# Altium PCB LAF_PD.PcbDoc
Units mm, origin at the board's own origin, x right, y up, seen from the top; angles counter-clockwise.
Board outline 30 x 30 mm, 2 copper layers (Top Layer, Bottom Layer); 5 components, 0 nets, 25 pads, 0 vias.
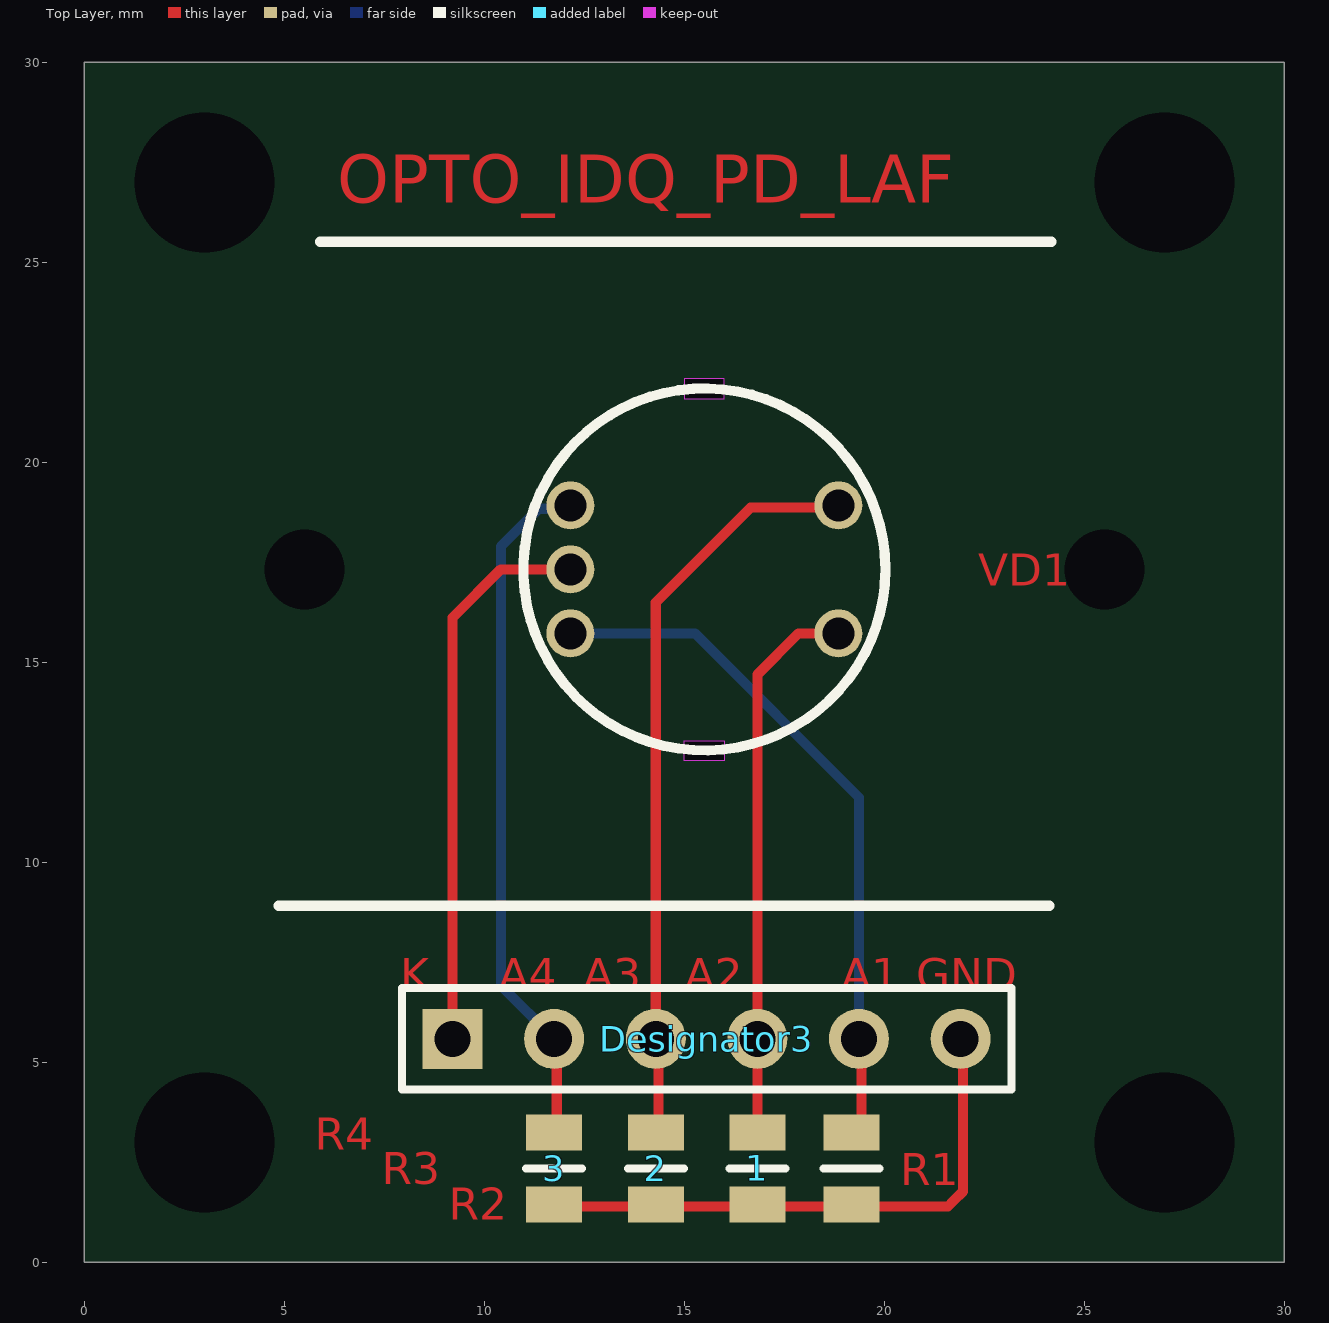
[diagram p0: Top Layer view]
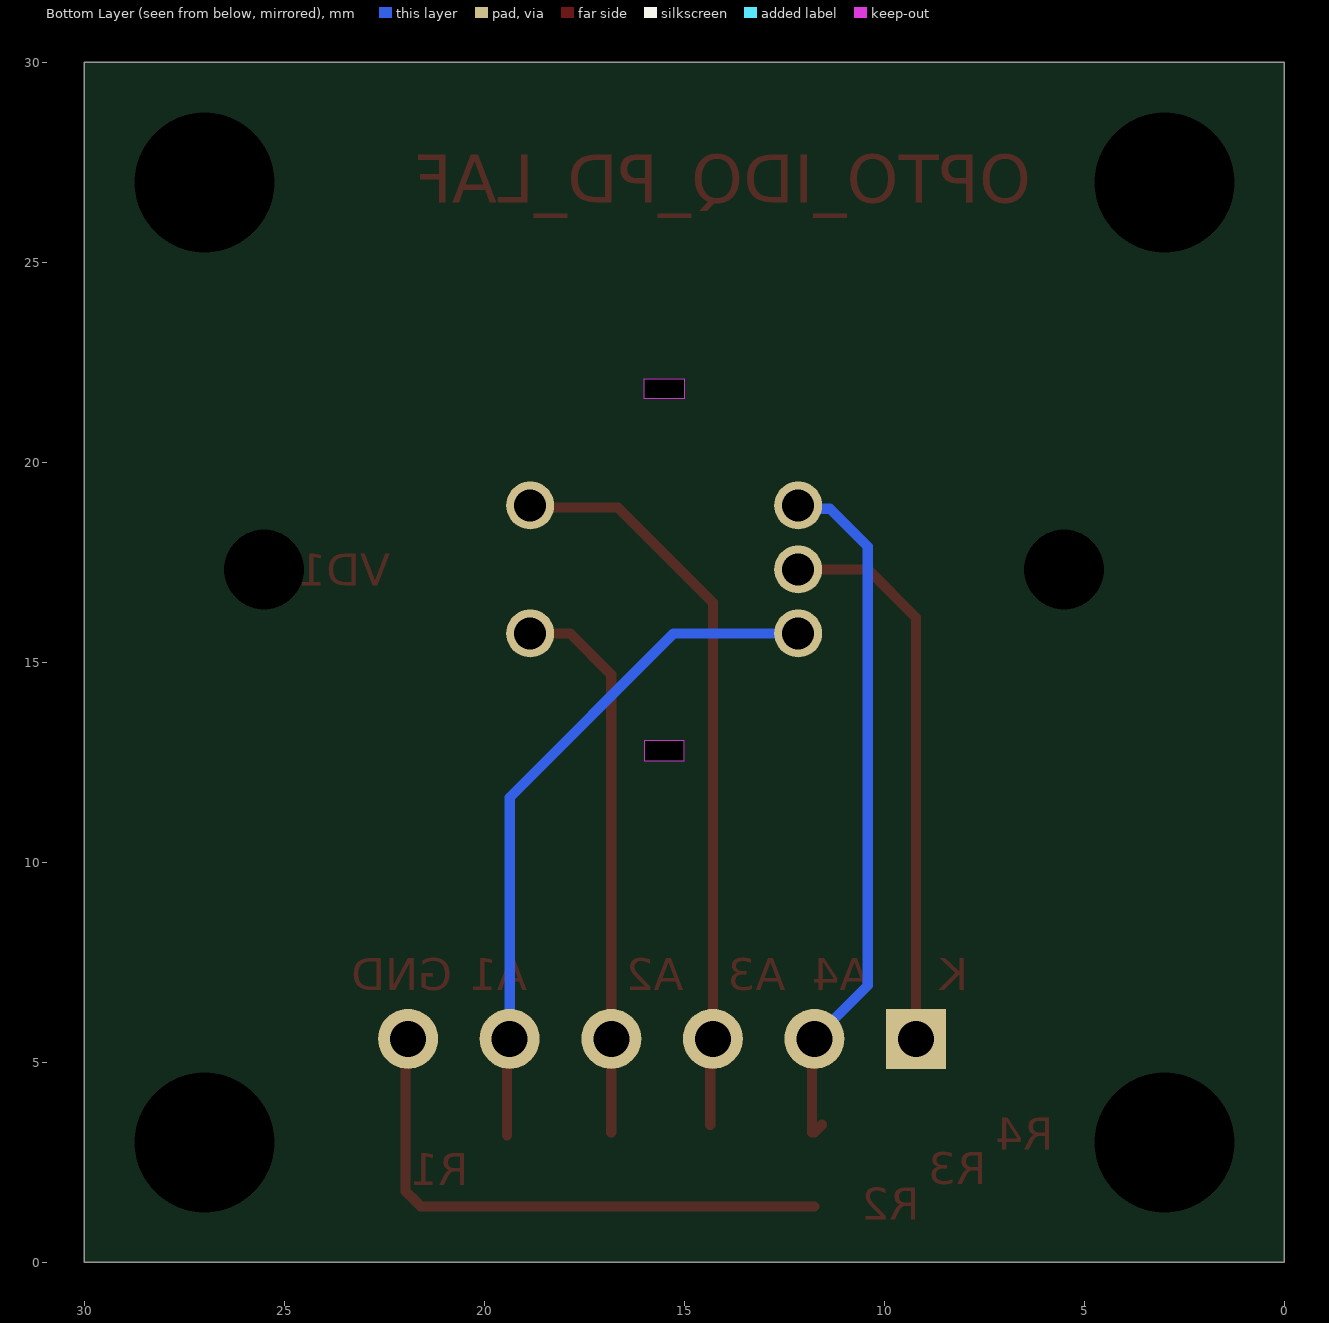
[diagram p1: Bottom Layer view, seen from below]

## Layer stack, top to bottom
Top Solder: solder mask 0.0102, Solder Resist, Dk 3.5
Top Layer: signal copper 0.0356
Dielectric 1: dielectric 0.32, FR-4, Dk 4.8
Bottom Layer: signal copper 0.0356
Bottom Solder: solder mask 0.0102, Solder Resist, Dk 3.5

## Board outline
0,0 0,30 30,30 30,0
cut-out: 15.002,12.538 15.002,13.038 16.002,13.038 16.002,12.538
cut-out: 15.002,22.088 15.002,21.588 16.002,21.588 16.002,22.088

## Design rules (kind name [scope] priority, off if disabled: settings)
Clearance [All] p1: gap=0.254 ignorepadtopadclearanceinfootprint=FALSE except(0: Arc-Hole Track-Hole SMDPad-Hole THPad-Hole Via-Hole Fill-Hole Poly-Hole Region-Hole Text-Hole)
PolygonConnect [All] p1: connectstyle=Relief reliefconductorwidth=0.254 reliefentries=4 polygonreliefangle="90 Angle" airgapwidth=0.254
RoutingVias [All] p1: holewidth=0.711 width=1.27 viastyle="Through Hole" minholewidth=0.711 minwidth=1.27 maxholewidth=0.711 maxwidth=1.27
SolderMaskExpansion [All] p1: expansion=0.102 istentingtop=FALSE
Width [All] p1: maxlimit=0.254 minlimit=0.254 preferedwidth=0.254
30 further rules are at their usual default settings.

## Components (designator, comment, footprint, x,y, rotation, side; value= is the part's Value field where it differs from the comment)
1 "Comment" FP-MCU0805-MFG 16.826,2.349 r90 top
2 "Comment" FP-MCU0805-MFG 14.286,2.349 r90 top
3 "Comment" FP-MCU0805-MFG 11.746,2.349 r90 top
Designator3 "Comment" HDR1X6 9.206,5.588 r0 top
? "Comment" FP-MCU0805-MFG 19.177,2.349 r90 top

## Footprints (in the part's own frame and the unit in brackets; to place one, negate y for a bottom-side part, rotate by r counter-clockwise, add the part's x,y. Pads: shape width x height; smd on the part's side, far side on the other; paste and mask are expansions set on the pad)
FP-MCU0805-MFG [mm]
  rect 0.9x1.4 smd paste+0 mask+0: 1(-0.9,0) 2(0.9,0)
  silkscreen extent 0,-0.7 0,0.7, body extent -1.45,-0.8 1.45,0.8, height 0.25
HDR1X6 [mm] "Connector; Header; 6 Position"
  rect 1.5x1.5 hole 0.9: 1(0,0)
  round 1.5 hole 0.9: 2(2.54,0) 3(5.08,0) 4(7.62,0) 5(10.16,0) 6(12.7,0)
  silkscreen extent -1.27,-1.27 13.97,1.27

## Free pads (board coordinates)
  round 1.524 hole 2: 2(5.502,17.323) 3(25.502,17.323)
  round 1.524 hole 3.5: 4(3,3) 5(27,3) 6(27,27) 7(3,27)
  round 1.2 hole 0.8: A1(12.152,15.723) A2(18.852,15.723) A3(18.852,18.923) A4(12.152,18.923) K(12.152,17.323)

## Nets (pads, with @x,y where several pads share a name; then routed paths per layer and width w, separated by ;. In a path a pad name is that pad's centre, name@x,y a point inside that pad or via, vN(x,y) a via of type N, cw(c..) or ccw(c..) an arc to the next point about the centre after c; other vN are vias at no path point)
pads on no net: 1.1 1.2 2.1 2.2 3.1 3.2 ?.1 ?.2 Designator3.1 Designator3.2 Designator3.3 Designator3.4 Designator3.5 Designator3.6
copper on no net: | length 95.7
  Top Layer w0.254: 9.206,5.588 9.206,16.115 10.414,17.323 12.152,17.323 ; 11.557,3.438 11.746,3.249 ; 11.746,1.397 21.59,1.397 21.717,1.524 21.971,1.778 21.971,4.191 21.971,5.015 21.971,5.588 ; 11.811,3.249 11.811,5.588 ; 14.351,3.429 14.351,4.33 14.351,5.523 14.286,5.588 14.286,16.496 16.662,18.872 18.802,18.872 18.852,18.923 ; 16.826,3.249 16.826,5.588 16.826,14.692 17.856,15.723 18.852,15.723 ; 19.431,3.175 19.431,5.588
  Bottom Layer w0.254: 11.746,5.588 10.414,6.92 10.414,17.896 11.357,18.839 12.068,18.839 12.152,18.923 ; 12.152,15.723 15.265,15.723 19.366,11.622 19.366,5.588

## Other copper
Top Layer:
  text "OPTO_IDQ_PD_LAF" at 6.325,26.489 h1.2
  text "VD1" at 22.35,16.914 h0.8
  text "K" at 7.897,6.805 h0.8
  text "A4" at 10.361,6.805 h0.8
  text "A3" at 12.469,6.805 h0.8
  text "A2" at 15.009,6.805 h0.8
  text "A1" at 18.921,6.805 h0.8
  text "GND" at 20.8,6.805 h0.8
  text "R4" at 5.763,2.817 h0.8
  text "R3" at 7.44,1.953 h0.8
  text "R1" at 20.394,1.928 h0.8
  text "R2" at 9.116,1.064 h0.8

## Silkscreen, mask and mechanical layers (free items; w line width, h text height)
Top Overlay:
  circle w0.254: c15.502,17.323 r4.525
  lines w0.254: 4.851,8.913 24.13,8.913 ; 5.893,25.513 24.181,25.513
Mechanical 1:
  lines w0.254: 0,0 30,0 30,30 0,30 0,0 ; 15.002,21.588 16.002,21.588 16.002,22.088 15.002,22.088 15.002,21.588 ; 15.011,12.548 16.002,12.548 16.002,13.03 15.011,13.03 15.011,12.548